# Altium PCB Jukebox PCB.PCBDOC (part 3 of 3)
Units mil, origin at the board's own origin, x right, y up, seen from the top; angles counter-clockwise.
Board outline 8310.03 x 5810.03 mil, 2 copper layers (Top Layer, Bottom Layer); 100 components, 181 nets, 737 pads, 268 vias.
Unrouted connection lines stored in the file: 109.
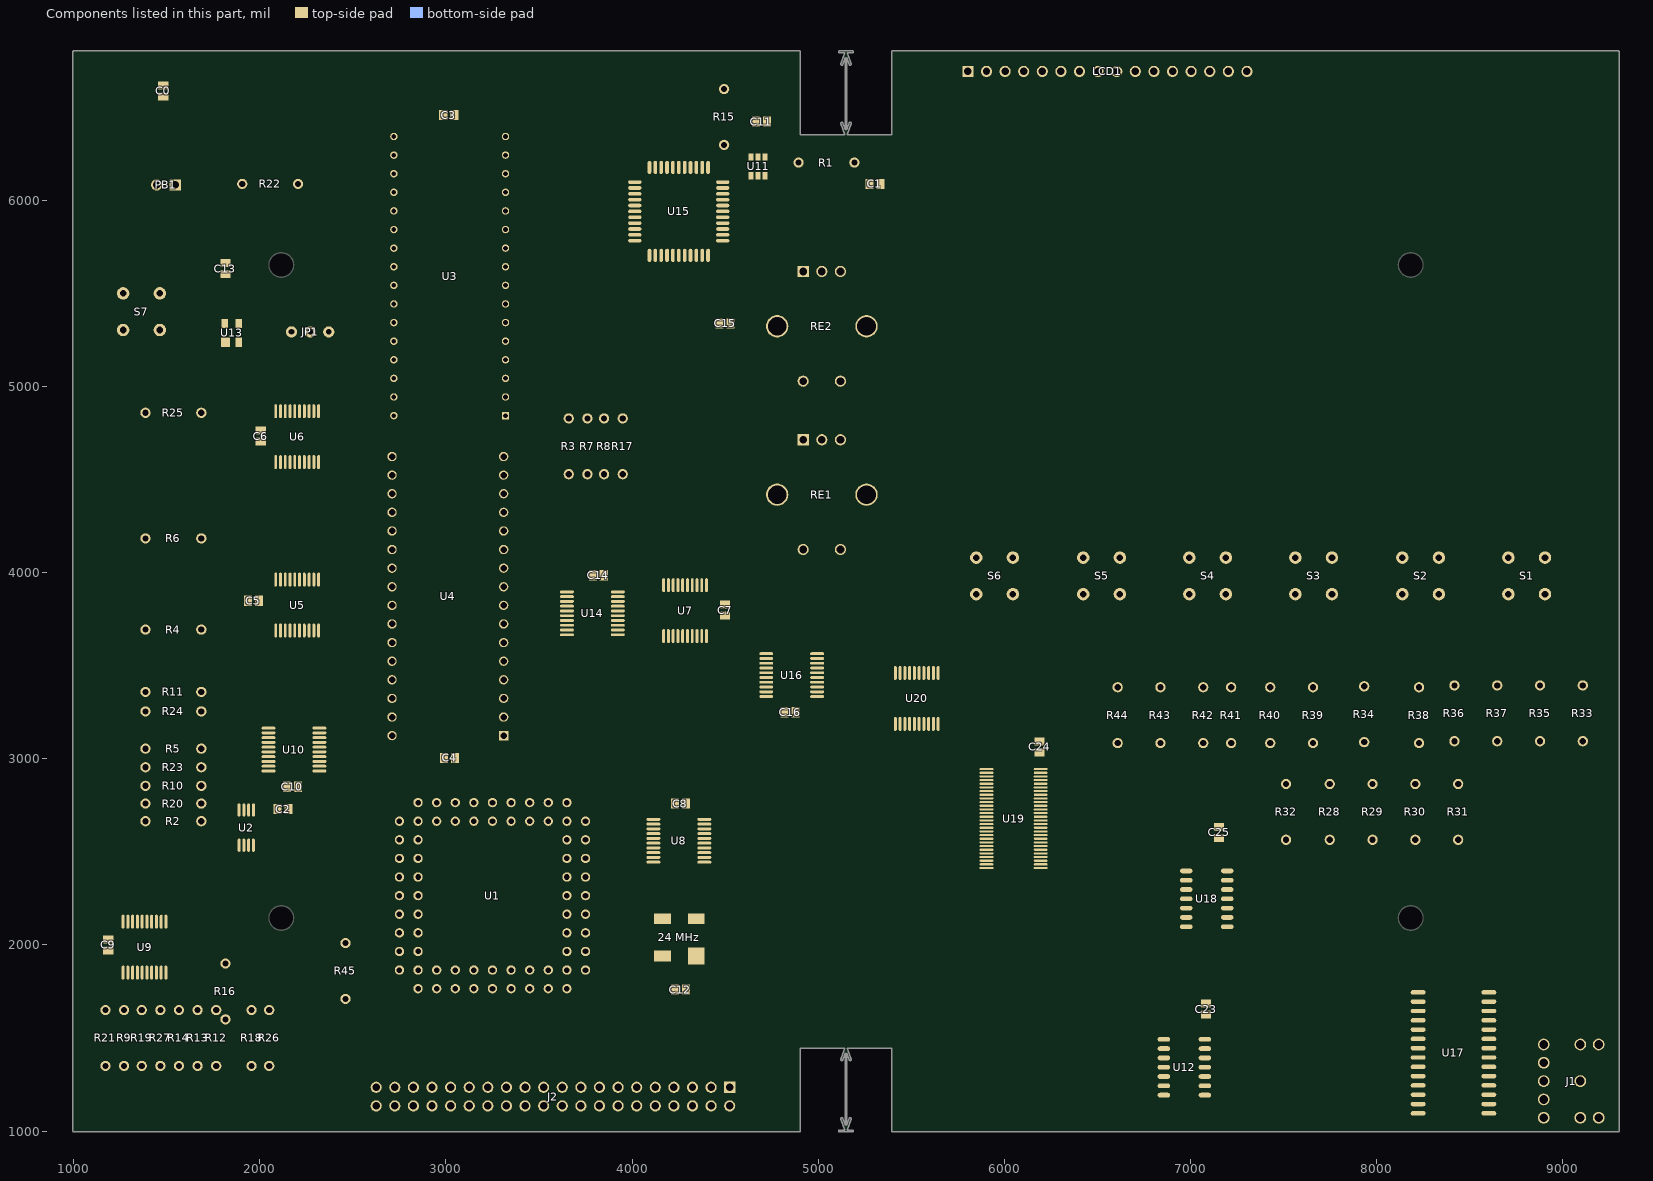
[diagram p3: the components of this part, seen from the top]

## Silkscreen, mask and mechanical layers (free items; w line width, h text height) (continued)
Mechanical 1:
  lines w10: 1000,800 1000,850 ; 1000,6900 1000,6950 ; 1000,7205 1000,7275 ; 1066.87,802.71 1000,825 ; 1066.87,847.29 1000,825 ; 1066.87,6902.71 1000,6925 ; 1066.87,6947.29 1000,6925 ; 1066.87,7217.71 1000,7240 ; 1066.87,7262.29 1000,7240 ; 1965,5505 1965,5805 2265,5805 2265,5505 ; 2556.61,825 1000,825 ; 2556.61,6925 1000,6925 ; 3278.39,825 4900,825 ; 3278.39,6925 4900,6925 ; 4833.13,802.71 4900,825 ; 4833.13,847.29 4900,825 ; 4833.13,6902.71 4900,6925 ; 4833.13,6947.29 4900,6925 ; 4870,7240 1000,7240 ; 4900,680 4900,880 ; 4900,6880 4900,7060 ; 4966.87,712.71 4900,735 ; 4966.87,757.29 4900,735 ; 4966.87,6992.71 4900,7015 ; 4966.87,7037.29 4900,7015 ; 5115,1000 5185,1000 ; 5115,6800 5185,6800 ; 5125,1450 5175,1450 ; 5125,6350 5175,6350 ; 5127.71,1066.87 5150,1000 5172.29,1066.87 ; 5127.71,1383.13 5150,1450 ; 5127.71,6416.87 5150,6350 ; 5127.71,6733.13 5150,6800 ; 5150,1003.4 5150,1450 ; 5172.29,1383.13 5150,1450 ; 5172.29,6416.87 5150,6350 ; 5172.29,6733.13 5150,6800 ; 5333.13,712.71 5400,735 ; 5333.13,757.29 5400,735 ; 5333.13,6992.71 5400,7015 ; 5333.13,7037.29 5400,7015 ; 5400,710 5400,760 ; 5400,6990 5400,7040 ; 5570,7240 9300,7240 ; 9233.13,7217.71 9300,7240 ; 9233.13,7262.29 9300,7240 ; 9300,7205 9300,7275 ; 9400,1000 9490,1000 ; 9400,6800 9490,6800 ; 9417.71,1066.87 9445,1000 ; 9417.71,6733.13 9445,6800 ; 9445,3451.61 9445,1000 ; 9445,4153.39 9445,6800 ; 9472.29,1066.87 9445,1000 ; 9472.29,6733.13 9445,6800 ; 4900,735 5400,735 ; 4900,7015 5400,7015 ; 5150,6350 5150,6800 ; 1000,1000 1000,6800 4900,6800 4900,6350 5400,6350 5400,6800 9300,6800 9300,1000 5400,1000 5400,1450 4900,1450 4900,1000 1000,1000 ; 1965,1995 1965,2295 2265,2295 2265,1995 1965,1995 ; 8035,1995 8035,2295 8335,2295 8335,1995 8035,1995 ; 8035,5505 8035,5805 8335,5805 8335,5505 8035,5505
  text ".LAYER_NAME" at 1015,7235 h100
  text "8300mil" at 4911.61,7206.56 h100
  text "500mil" at 4991.6,7056.56 h60
  text "3900mil" at 2611.61,6891.56 h100
  text "450mil" at 5258.44,6416.6 h60 r90
  text "5800mil" at 9411.56,4113.39 h100 r270
  text "450mil" at 5031.56,1383.4 h60 r270
  text "3900mil" at 2611.61,791.56 h100
  text "500mil" at 4991.6,776.56 h60
Mechanical 3:
  text ".LAYER_NAME" at 1015,7235 h100
Mechanical 4:
  lines w30: 985,1195 985,985 1195,985 ; 985,6605 985,6815 1195,6815 ; 9105,985 9315,985 9315,1195
Drill Drawing:
  text ".LAYER_NAME" at 1015,7235 h100